# Altium PCB Driver Morpheus v7.0.PcbDoc
Units mm, origin at the board's own origin, x right, y up, seen from the top; angles counter-clockwise.
Board outline 44.45 x 39.88 mm, 2 copper layers (Top Layer, Bottom Layer); 50 components, 26 nets, 168 pads, 13 vias.
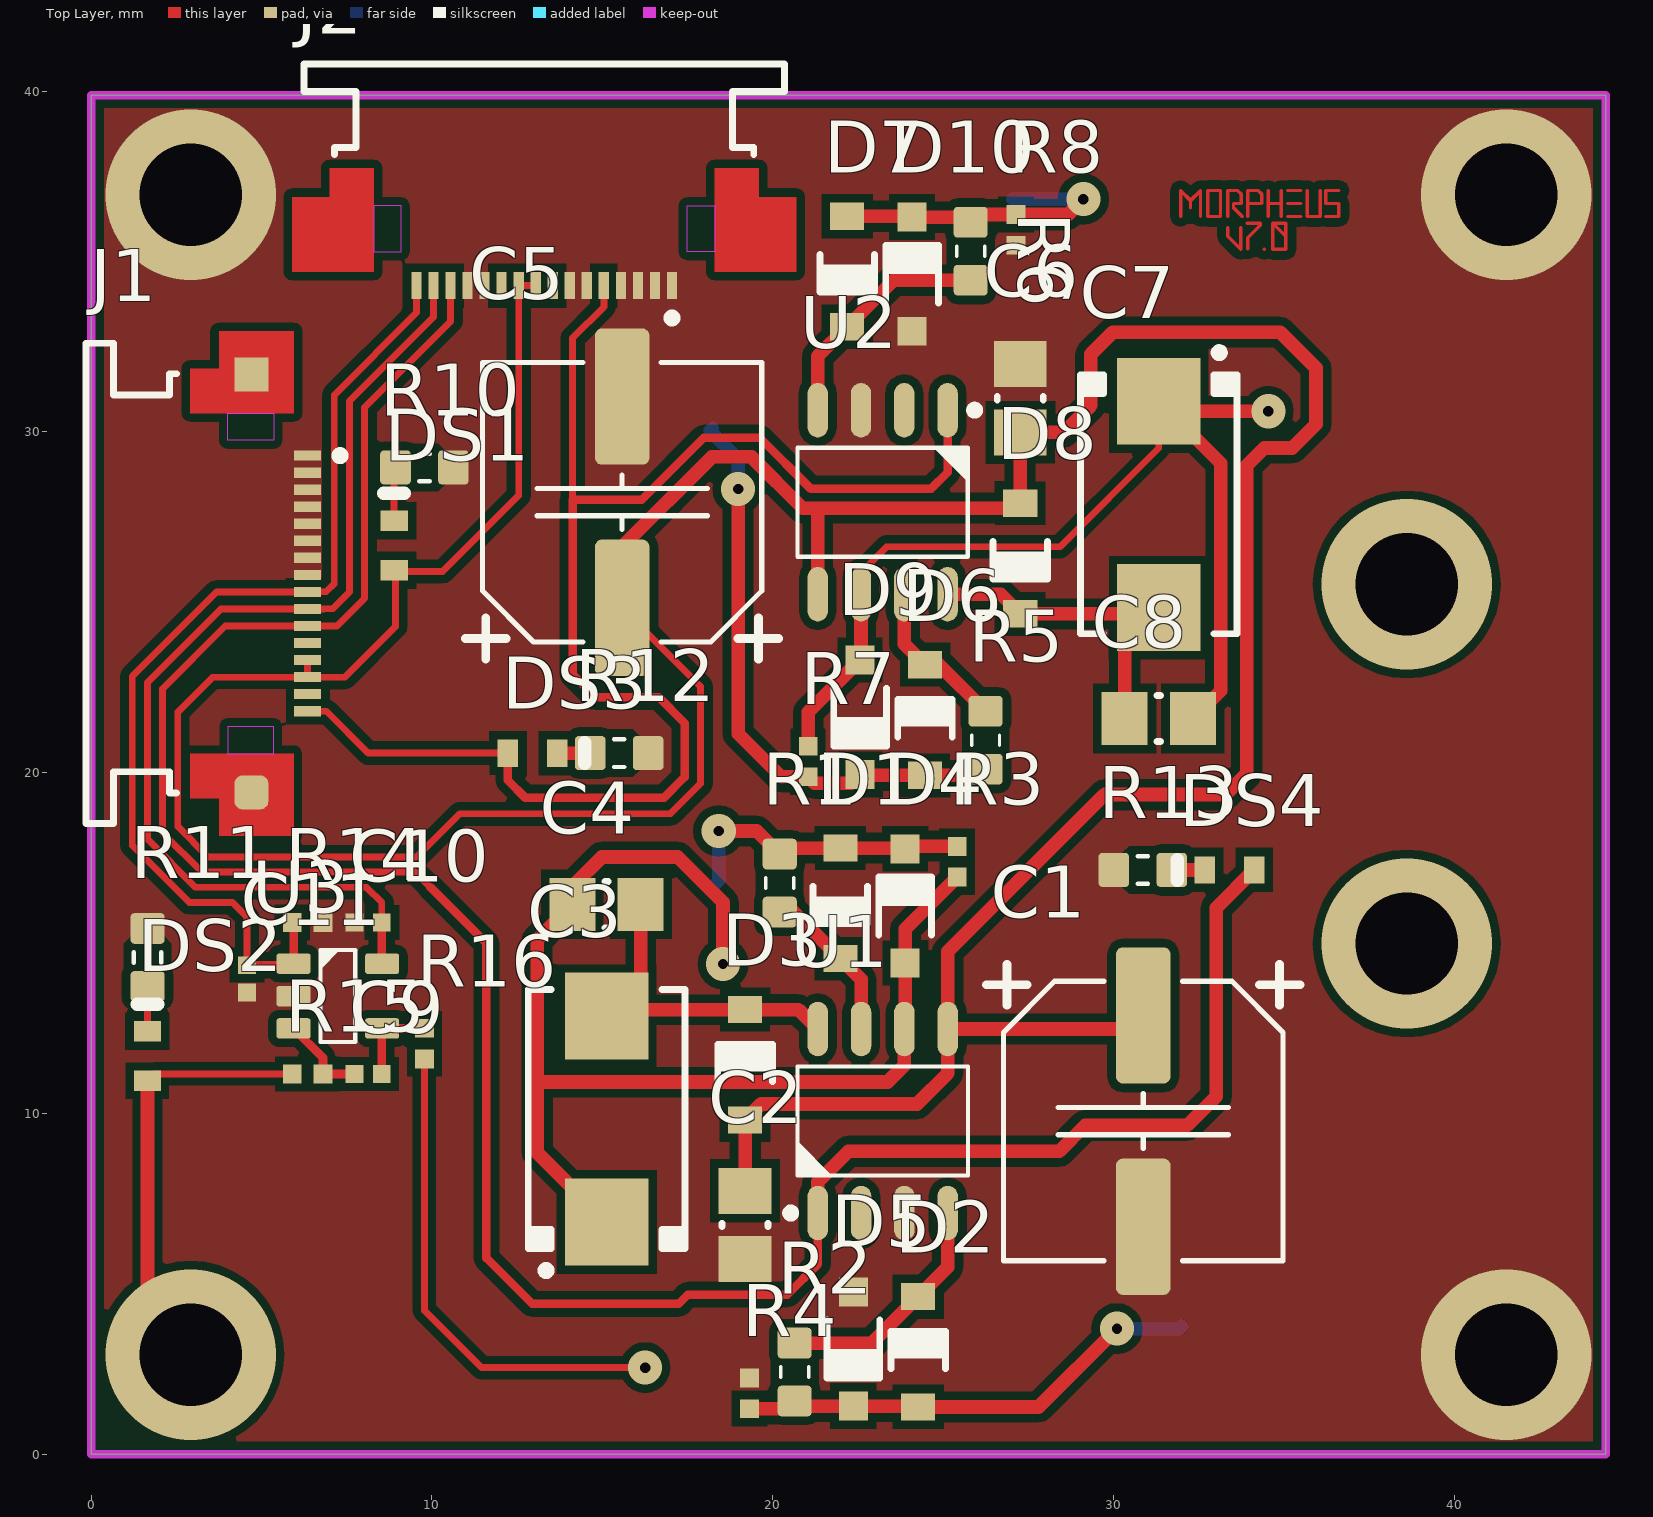
[diagram p0: Top Layer view]
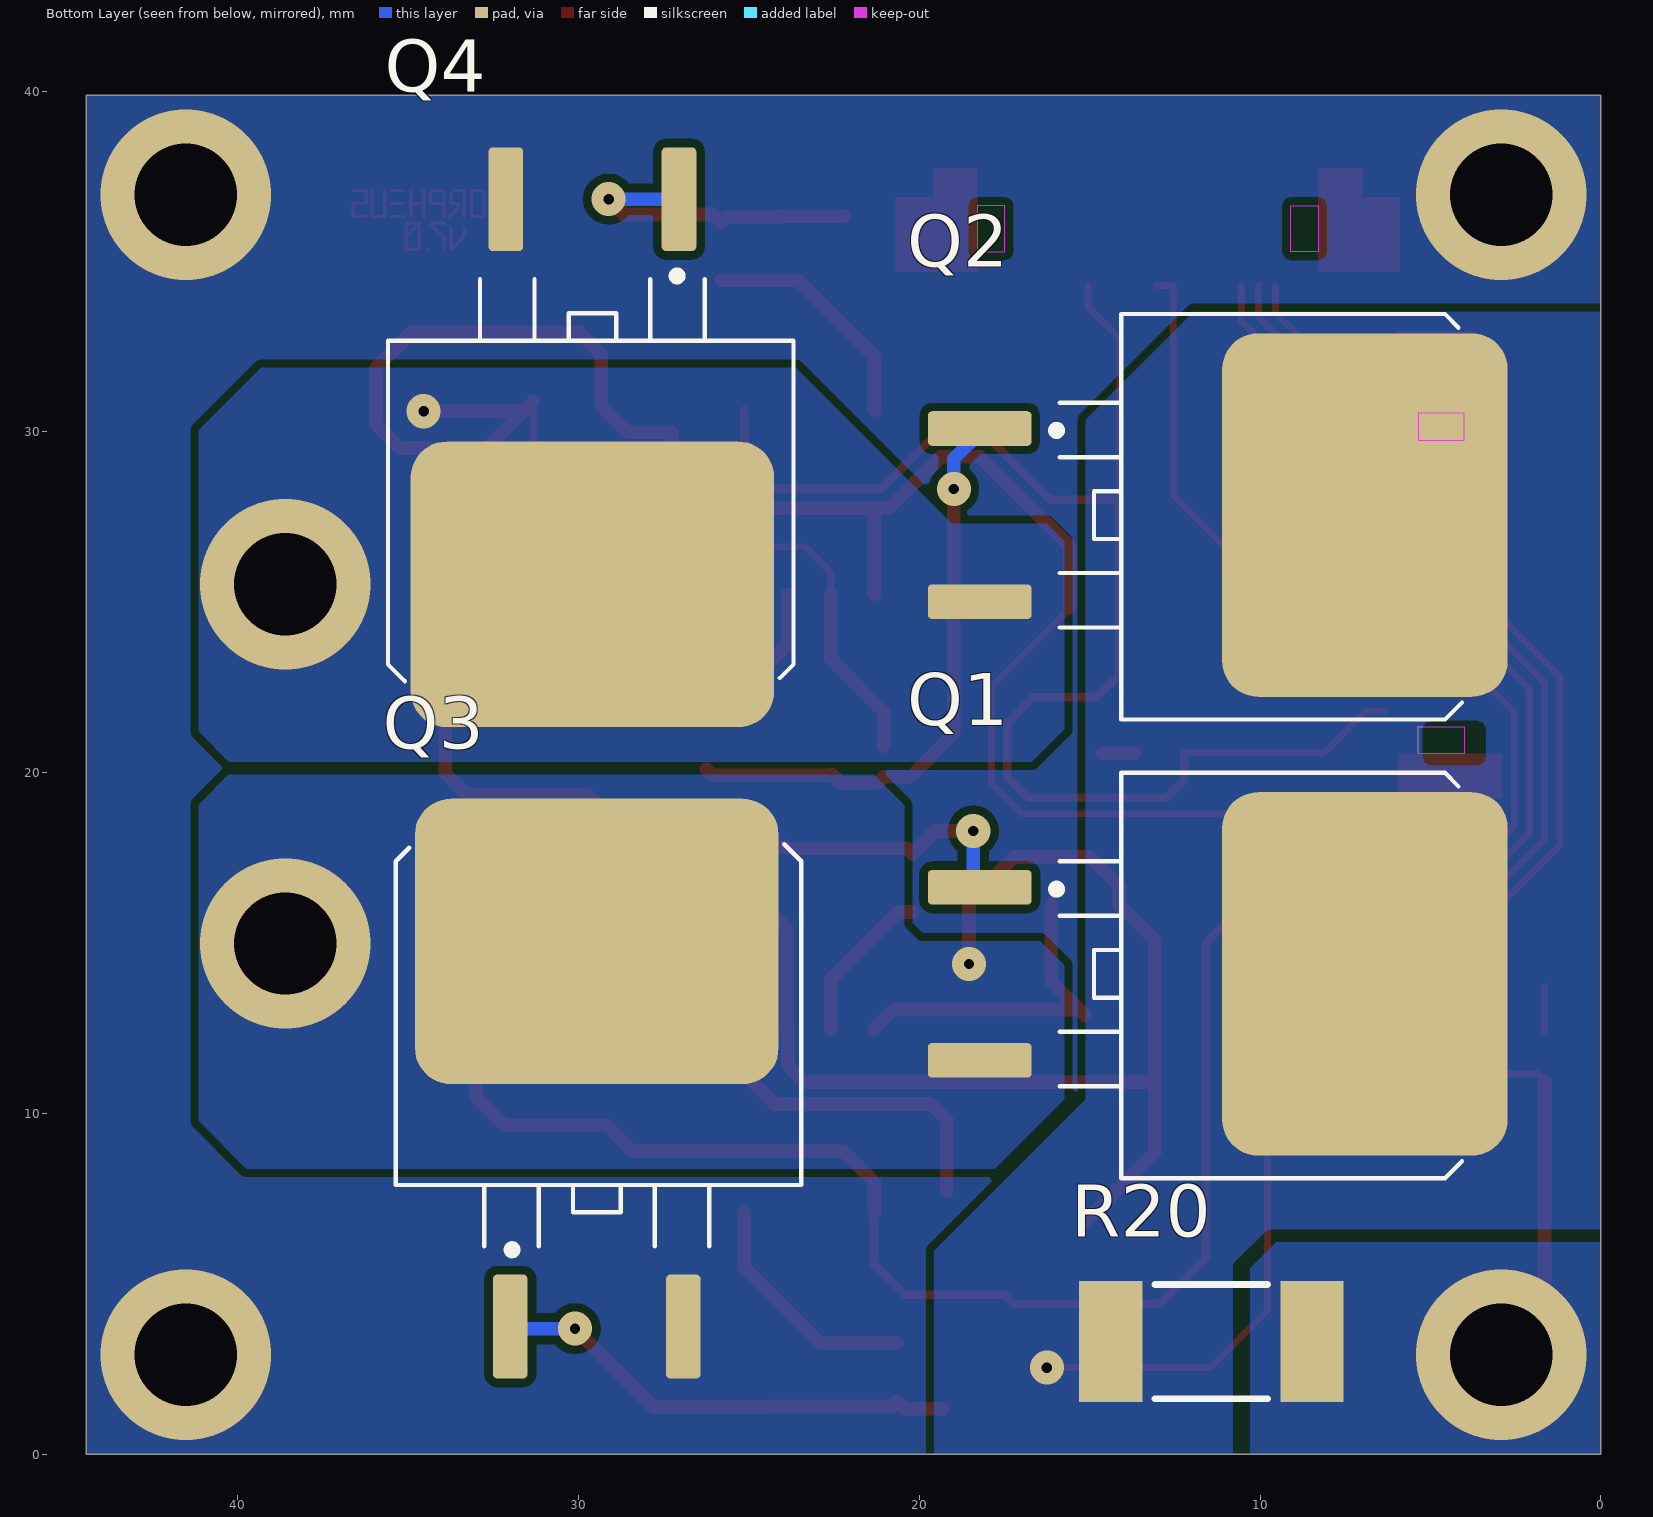
[diagram p1: Bottom Layer view, seen from below]
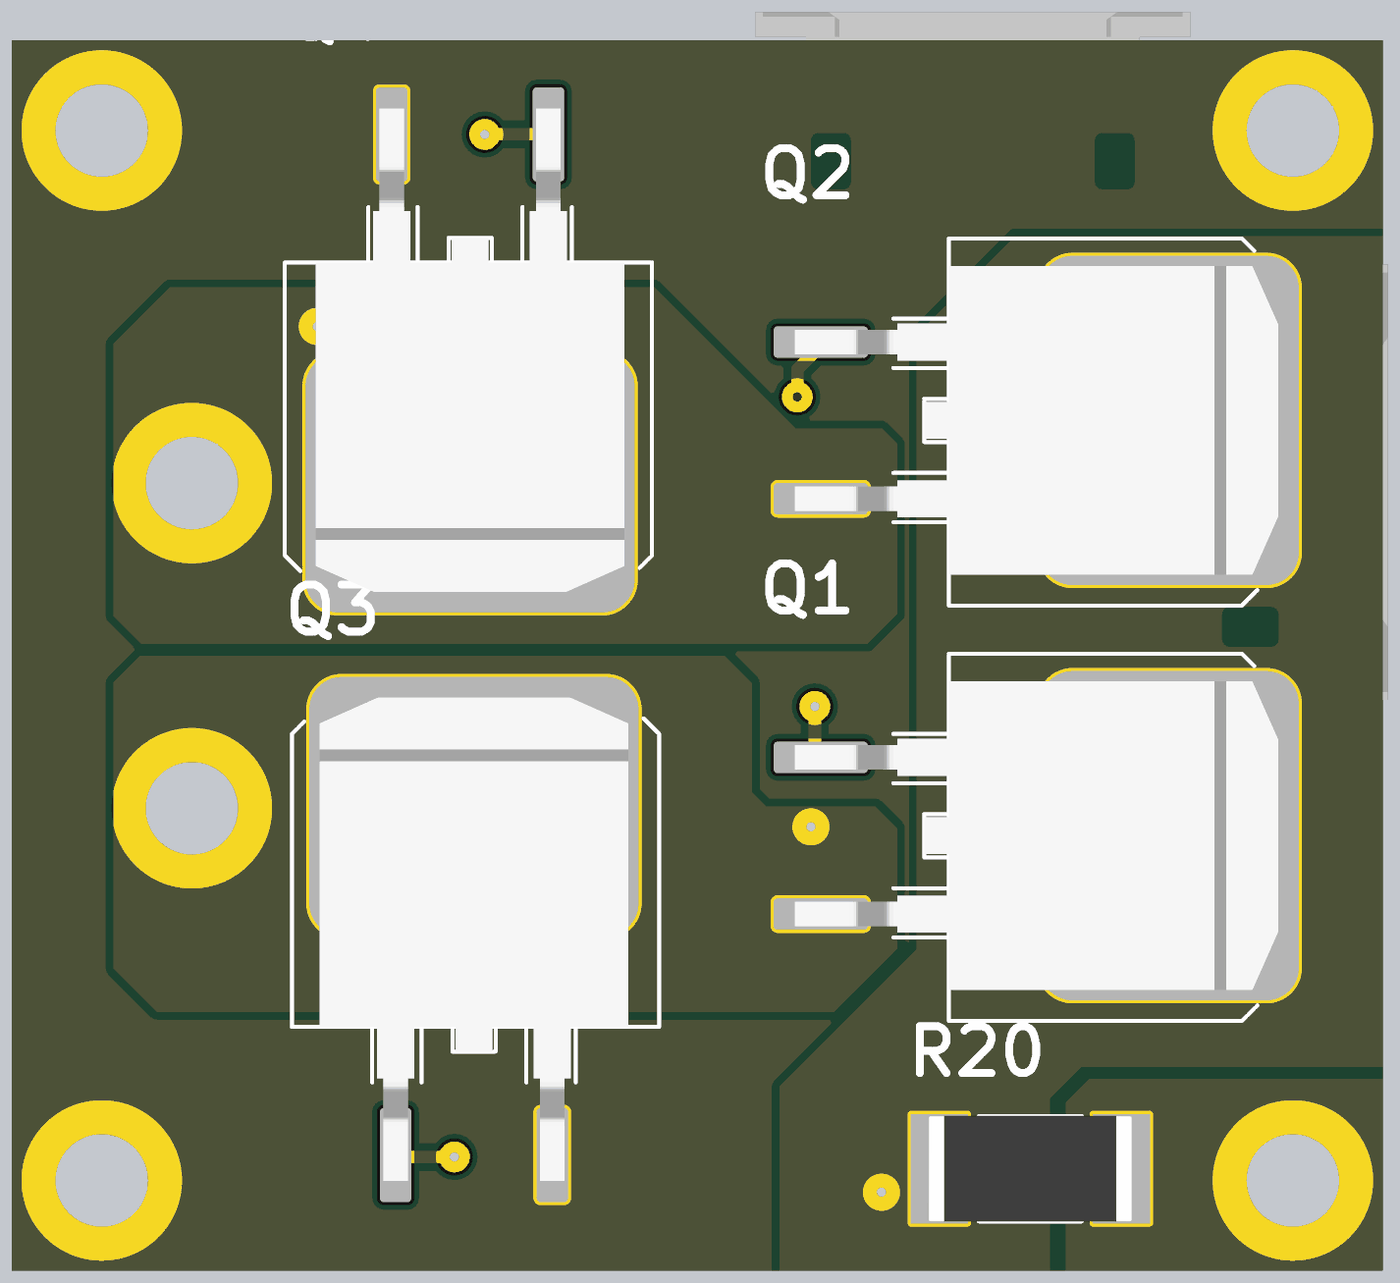
[diagram p2: 3D render of the assembled board from below, using the file's embedded part models]

## Layer stack, top to bottom
Top Solder: solder mask 0.0102, Solder Resist, Dk 3.5
Top Layer: signal copper 0.0356
Dielectric 1: dielectric 0.32, FR-4, Dk 4.8
Bottom Layer: signal copper 0.0356
Bottom Solder: solder mask 0.0102, Solder Resist, Dk 3.5

## Board outline
0,0 44.45,0 44.45,39.878 0,39.878

## Design rules (kind name [scope] priority, off if disabled: settings)
Clearance [All] p1: gap=0.245 ignorepadtopadclearanceinfootprint=TRUE
PlaneConnect [All] p1: planeconnectstyle=Direct reliefexpansion=0.508 reliefentries=4 reliefconductorwidth=0.254 reliefairgap=0.254
PolygonConnect [All] p1: connectstyle=Direct reliefconductorwidth=0.254 reliefentries=4 polygonreliefangle="90 Angle" airgapwidth=0.254
RoutingVias [All] p1: holewidth=0.711 width=1.27 viastyle="Through Hole" minholewidth=0.711 minwidth=1.27 maxholewidth=0.711 maxwidth=1.27
SolderMaskExpansion [All] p1: expansion=0.102
Width [All] p1: maxlimit=0.54 minlimit=0.1 preferedwidth=0.1
29 further rules are at their usual default settings.

## Classes and differential pairs
component class INA169: C9 C10 C11 R14 R15 R16 U3 U?
component class "Driver Morpheus V6.2": C1 C2 C3 C4 C5 C6 C7 C8 D1 D2 D3 D4 D5 D6 D7 D8 D9 D10 DS1 DS2 DS3 DS4 J1 J2 Q1 Q2 Q3 Q4 R1 R2 R3 R4 R5 R6 R7 R8 R10 R11 R12 R13 R20 U1 U2

## Components (designator, comment, footprint, x,y, rotation, side; value= is the part's Value field where it differs from the comment)
C1 "100uF 25v" CAP_ELEC_SIZE_E 30.873,9.777 r180 top
C2 "CAP 100nF 25V 0805(2012)" CAPC0805(2012)145_M 19.189,6.729 r90 top value=100nF
C3 "Cap_10u_35v" "CAP POL 2917/7343" 15.125,9.84 r90 top
C4 "CAP 100nF 25V 0805(2012)" CAPC0805(2012)145_M 15.125,16.127 r0 top value=100nF
C5 "100uF 25v" CAP_ELEC_SIZE_E 15.58,27.938 r0 top
C6 "CAP 100nF 25V 0805(2012)" CAPC0805(2012)145_M 27.264,30.986 r270 top value=100nF
C7 "Cap_10u_35v" "CAP POL 2917/7343" 31.328,27.875 r270 top
C8 "CAP 100nF 25V 0805(2012)" CAPC0805(2012)145_M 31.328,21.588 r180 top value=100nF
C9 "CAP 100nF 25V" CAPC0402(1005)60_L 8.128,11.158 r180 top value=100nF
C10 "CAP 100nF 25V" CAPC0402(1005)60_L 8.128,15.603 r0 top value=100nF
C11 "CAP 100nF 25V" CAPC0402(1005)60_L 4.572,13.952 r90 top value=100nF
D1 "1N4148W" JSCJ-SOD-123-2_V 21.983,16.167 r270 top
D2 "1N4148W" JSCJ-SOD-123-2_V 24.269,3.006 r90 top
D3 "1N4148W" JSCJ-SOD-123-2_V 19.189,11.428 r90 top
D4 "MMSZ5248B-E3-08" VISH-SOD-123-2_V 23.888,16.087 r90 top
D5 "MMSZ5248B-E3-08" VISH-SOD-123-2_V 22.364,3.086 r270 top
D6 "1N4148W" JSCJ-SOD-123-2_V 24.47,21.548 r90 top
D7 "1N4148W" JSCJ-SOD-123-2_V 22.184,34.709 r270 top
D8 "1N4148W" JSCJ-SOD-123-2_V 27.264,26.287 r270 top
D9 "MMSZ5248B-E3-08" VISH-SOD-123-2_V 22.565,21.628 r270 top
D10 "MMSZ5248B-E3-08" VISH-SOD-123-2_V 24.089,34.629 r90 top
DS1 "TLMB1100-GS08" VISH-TLMX1100-2_V 8.89,26.67 r90 top
DS2 "TLMS1100-GS08" VISH-TLMX1100-2_V 1.651,11.684 r90 top
DS3 "TLMG1100-GS08" VISH-TLMX1100-2_V 12.954,20.574 r0 top
DS4 "TLMG1100-GS08" VISH-TLMX1100-2_V 33.401,17.145 r180 top
J1 "52746-1671" MOLX-52746-1671#1 5.526,25.555 r270 top
J2 "52746-1671" MOLX-52746-1671#2 13.294,35.117 r180 top
Q1 "IRF3205S" D2PAK-3 12.573,14.097 r0 bottom
Q2 "IRF3205S" D2PAK-3 12.573,27.559 r0 bottom
Q3 "IRF3205S" D2PAK-3 29.464,9.398 r270 bottom
Q4 "IRF3205S" D2PAK-3 29.591,31.178 r90 bottom
R1 "22" 0603ESDA 20.205,16.762 r90 top
R2 "22" 0603ESDA 20.644,2.411 r270 top
R3 "RC0402JR-071KL" RES-0402 25.412,17.387 r90 top value=10K
R4 "RC0402JR-071KL" RES-0402 19.316,1.786 r270 top value=10K
R5 "22" 0603ESDA 26.248,20.953 r90 top
R6 "22" 0603ESDA 25.809,35.304 r270 top
R7 "RC0402JR-071KL" RES-0402 21.041,20.328 r270 top value=10K
R8 "RC0402JR-071KL" RES-0402 27.137,35.929 r90 top value=10K
R10 "Thick Film" RESC1608X55N 9.779,28.956 r0 top value=750R
R11 "Thick Film" RESC1608X55N 1.653,14.578 r90 top value=2k
R12 "Thick Film" RESC1608X55N 15.494,20.574 r0 top value=200R
R13 "Thick Film" RESC1608X55N 30.861,17.145 r180 top value=200R
R14 "RC0402JR-071KL" RES-0402 6.35,15.603 r180 top value=10K
R15 "RC0402JR-071KL" RES-0402 6.35,11.158 r180 top value=100R
R16 "RC0402JR-071KL" RES-0402 9.779,12.047 r270 top value=100R
R20 "71-WSLF25121L000FEA" RESC6432X89X76ML25T25 11.43,3.302 r180 bottom
U1 "IR2184" SOIC127P600X175-8AN 23.228,9.777 r90 top
U2 "IR2184" SOIC127P600X175-8AN 23.225,27.938 r270 top
U3 "INA169" SOT23-5 7.239,13.444 r0 top

## Footprints (in the part's own frame and the unit in brackets; to place one, negate y for a bottom-side part, rotate by r counter-clockwise, add the part's x,y. Pads: shape width x height; smd on the part's side, far side on the other; paste and mask are expansions set on the pad)
0603ESDA [mm] "Chip ESD suppressor, Body 1.6x0.8mm, 0603, IPC Medium Density"
  round 0.254 on Mech15: 0(0,0)
  rrect25% 0.9x1 smd: 1(-0.85,0) 2(0.85,0)
  Top Layer pour cut-out: -0.65,0.5 -0.45,0.7 0.45,0.7 0.65,0.5 0.65,-0.5 0.45,-0.7 -0.45,-0.7 -0.65,-0.5
  silkscreen extent -0.15,-0.41 0.15,0.41, body extent -0.85,-0.45 0.85,0.45, height 0.79
"CAP POL 2917/7343" [mm] "Molded Capacitor, 2-Leads, Body 7.30x4.30mm, IPC Medium Density"
  rect 2.55x2.45 smd: 1(-3.025,0) 2(3.025,0)
  silkscreen extent -4.57,-2.3 3.8,2.3, body extent -3.65,-2.15 3.65,2.15, height 4.1
CAP_ELEC_SIZE_E [mm] "Capacitor, polarized, aluminum can; 8.0x6.2mm DxH"
  round 0.635 on Mech15: 0(0,0)
  rrect25% 1.6x4 smd: 1(0,-3.1) 2(0,3.1)
  silkscreen extent -4.6,-4.6 4.6,4.1, body extent -4.25,-4.75 4.25,4.75, height 6.5
CAPC0402(1005)60_L [mm] "Chip Capacitor, Body 1.0x0.5mm, Height 0.6mm, IPC High Density"
  rect 0.52x0.52 smd: 1(-0.4,0) 2(0.4,0)
  body extent -0.55,-0.3 0.55,0.3, height 0.6
CAPC0805(2012)145_M [mm] "Chip Capacitor, Body 2.0x1.2mm, Height 1.45mm, IPC Low Density"
  rect 1.35x1.55 smd: 1(-1,0) 2(1,0)
  silkscreen extent -0.05,-0.67 0.05,0.67, body extent -1.1,-0.72 1.1,0.72, height 1.45
D2PAK-3 [mil] "D-PAK/TO-263-3; 3 Leads (1 Cropped); Body 14.7 (inc. leads) x 10.2 mm (LxW max)"
  round 20 on Mech15: 0(0,0)
  rrect25% 120x40 smd: 1(222.5,-100) 3(222.5,100)
  rrect25% 330x420 smd: 2(-222.5,0)
  silkscreen extent -335,-232 139,236, body extent -361,-197 256,197, height 189
JSCJ-SOD-123-2_V [mm] "SMD, 2-Leads, Body 2.7x1.6mm, Height 1.25mm"
  rect 0.8x1 smd: 1(-1.62,0) 2(1.62,0)
  silkscreen extent -0.5,-0.8 0.6,0.8, body extent -1.35,-0.8 1.35,0.8, height 1.25
MOLX-52746-1671#1 [mm] "FPC Connector, 16-Leads, Right Angle, Pitch 0.5 mm, Mated Height 2.0 mm, SMT"
  rect 0.3x0.8 smd: 1(-3.75,0.824) 2(-3.25,0.824) 3(-2.75,0.824) 4(-2.25,0.824) 5(-1.75,0.824) 6(-1.25,0.824) 7(-0.75,0.824) 8(-0.25,0.824) 9(0.25,0.824) 10(0.75,0.824) 11(1.25,0.824) 12(1.75,0.824) 13(2.25,0.824) 14(2.75,0.824) 15(3.25,0.824) 16(3.75,0.824)
  rect 1x1 smd: MP1(-6.134,-0.824)
  rrect50% 1x1 smd: MP2(6.134,-0.824)
  Top Layer region: -7.4,0.424 -5,0.424 -5,-2.626 -5,-2.626 -6.3,-2.626 -6.3,-1.777 -6.3,-1.776 -7.4,-1.776
  Top Layer region: 5,0.424 7.4,0.424 7.4,-1.776 7.4,-1.777 6.3,-1.777 6.3,-2.626 5,-2.626 5,0.424
  Keep-Out Layer region: -5,-0.176 -4.2,-0.176 -4.2,-1.516 -5,-1.516
  Keep-Out Layer region: 5,-0.176 4.2,-0.176 4.2,-1.516 5,-1.516
  silkscreen extent -7.05,-5.68 7.05,1.9, body extent -7.05,-5.68 7.05,0.92, height 2.01
MOLX-52746-1671#2 [mm] "FPC Connector, 16-Leads, Right Angle, Pitch 0.5 mm, Mated Height 2.0 mm, SMT"
  rect 0.3x0.8 smd: 1(-3.75,0.824) 2(-3.25,0.824) 3(-2.75,0.824) 4(-2.25,0.824) 5(-1.75,0.824) 6(-1.25,0.824) 7(-0.75,0.824) 8(-0.25,0.824) 9(0.25,0.824) 10(0.75,0.824) 11(1.25,0.824) 12(1.75,0.824) 13(2.25,0.824) 14(2.75,0.824) 15(3.25,0.824) 16(3.75,0.824)
  round 0 smd: MP1(-2.134,-0.824)
  rect 0x0 smd: MP2(3.134,-0.824)
  Top Layer region: -7.4,0.424 -5,0.424 -5,-2.626 -5,-2.626 -6.3,-2.626 -6.3,-1.777 -6.3,-1.776 -7.4,-1.776
  Top Layer region: 5,0.424 7.4,0.424 7.4,-1.776 7.4,-1.777 6.3,-1.777 6.3,-2.626 5,-2.626 5,0.424
  Keep-Out Layer region: -5,-0.176 -4.2,-0.176 -4.2,-1.516 -5,-1.516
  Keep-Out Layer region: 5,-0.176 4.2,-0.176 4.2,-1.516 5,-1.516
  silkscreen extent -7.05,-5.68 7.05,1.9, body extent -7.05,-5.68 7.05,0.92, height 2.01
RES-0402 [mm]
  rect 0.55x0.55 smd: 1(-0.45,0) 2(0.45,0)
  body extent -0.53,-0.27 0.53,0.28, height 0.4
RESC1608X55N [mm] "Chip Resistor, Body 1.6x0.8mm, EIA 0603, IPC Medium Density"
  round 0.254 on Mech15: 0(0,0)
  rrect25% 0.9x1 smd: 1(-0.85,0) 2(0.85,0)
  Top Layer pour cut-out: -0.6,0.5 -0.4,0.7 0.4,0.7 0.6,0.5 0.6,-0.5 0.4,-0.7 -0.4,-0.7 -0.6,-0.5
  silkscreen extent -0.15,-0.41 0.15,0.41, body extent -0.87,-0.47 0.88,0.48, height 0.54
RESC6432X89X76ML25T25 [mm] "Chip Resistor, 2-Leads, Body 6.6x3.43mm, IPC Low Density"
  rect 1.85x3.55 smd: 1(-2.95,0) 2(2.95,0)
  silkscreen extent -1.65,-1.68 1.65,1.68, body extent -3.3,-1.71 3.3,1.71, height 0.89
SOIC127P600X175-8AN [mm] "SOIC, 8-Leads, Body 4.9x3.9mm, Pitch 1.27mm, IPC Medium Density"
  round 1 on Mech15: 0(0,0)
  oval 1.6x0.6 smd: 1(-2.7,1.905) 2(-2.7,0.635) 3(-2.7,-0.635) 4(-2.7,-1.905) 5(2.7,-1.905) 6(2.7,-0.635) 7(2.7,0.635) 8(2.7,1.905)
  silkscreen extent -2.82,-2.5 1.6,2.82, body extent -3,-2.45 3,2.45, height 1.75
SOT23-5 [mm]
  round 0.5 on Mech15: 0(0,0)
  rrect25% 1x0.6 smd: 1(-1.3,0.95) 2(-1.3,0) 3(-1.3,-0.95) 4(1.3,-0.95) 5(1.3,0.95)
  silkscreen extent -0.51,-1.35 0.51,1.35, body extent -1.4,-1.45 1.4,1.45, height 1.44
VISH-SOD-123-2_V [mm] "SMD, 2-Leads, Body 2.7x1.55mm, Height 1.35mm"
  rect 0.85x0.85 smd: 1(-1.675,0) 2(1.675,0)
  silkscreen extent -0.85,-0.77 0.85,0.78, body extent -1.35,-0.77 1.35,0.77, height 1.35
VISH-TLMX1100-2_V [mm] "SMD, 2-Leads, Body 1.6x0.8mm"
  rect 0.6x0.8 smd: 1(-0.725,0) 2(0.725,0)
  silkscreen extent 1.53,-0.3 1.53,0.3, body extent -0.8,-0.4 0.8,0.4, height 0.65

## Part data
C1: library part Cap_10u_35v
C2 C4 C6 C8: library part CMP-1036-04408-1, "CAP 100nF 25V ±5% 0805 (2012 Metric) Thickness 1.45mm SMD", Case-EIA=0805, Case-Metric=2012, Rated Voltage="25 V", Tolerance=±5%, Max Thickness="1.45 mm", Technology=SMT
C5: library part Cap_100u_25v, "Cap Tântalo"
C9 C10 C11: library part CMP-1034-02073-1, "CAP 100nF 25V ±20% 0402 (1005 Metric) Thickness 0.6mm SMD", Case-EIA=0402, Case-Metric=1005, Rated Voltage="25 V", Tolerance=±20%, Max Thickness="0.6 mm", Technology=SMT
D1 D2 D3 D6 D7 D8: library part CMP-0914-00001-1, "Fast Switching Diode, 75 V, 150 mA, 2-Pin 2.7 x 1.6 x 1.25 mm SMD, Tape and Reel", Manufacturer="Changjiang Electronics", ComponentLink1Description="Manufacturer URL", ComponentLink1URL=http://www.cj-elec.com/, ComponentLink2Description=Datasheet, ComponentLink2URL=http://www.cj-elec.com/txUpfile/20121613352740313.pdf, ComponentLink3Description="Package Specification", ComponentLink3URL=http://www.cj-elec.com/txUpfile/201412112231195145.pdf, DatasheetVersion="Rev. A", IO (mA)=150, IR (uA)=1, Mounting Technology="Surface Mount", PackageDescription="2-Pin SMD, Body 2.7 x 1.6 mm, Height 1.25 mm", PackageReference=SOD-123-2, PackageVersion="Rev. A", Packing="Tape and Reel", PartNumber=1N4148W, PD (mW)=350, Trr (ns)=4, TSTG (degC)="-55 to 150", VF (V)=1.25, VR (V)=75
D4 D5 D9 D10: library part CMP-0931-00036-1, "Small Signal Zener Diode, 18 V +/- 5%, -55 to 155 degC, 2-Pin SOD-123, RoHS, Tape and Reel", Manufacturer="Vishay Semiconductor", Operating Temperature="-55 to 150 degC", Power Dissipation (mW)=500, Test Current (IZT1) (mA)=7, Tolerance="+/- 5%", Zener Voltage (NOM.) (V)=18, ComponentLink1Description="Manufacturer URL", ComponentLink1URL=http://www.vishay.com/, ComponentLink2Description=Datasheet, ComponentLink2URL=http://www.vishay.com/docs/85774/mmsz5225.pdf, ComponentLink3Description="Package Specification", ComponentLink3URL=http://www.vishay.com/docs/85774/mmsz5225.pdf, DatasheetVersion="Rev. 1.9", Int. Construction=Single, Mounting Technology="Surface Mount", PackageDescription="2-Pin SMD, Body 2.7 x 1.55 mm, Height 1.35 mm", PackageReference=SOD-123-2, PackageVersion="Rev. 1.9", Packing="Tape and Reel", PartNumber=MMSZ5248B-E3-08, RoHS=TRUE, Zener Impedance (IZT1) (Max.) (Ohm)=21
DS1: library part CMP-1666-00028-1, "Blue LED, 15 mA, 3.9 V, -40 to 100 degC, 2-Pin SMD (0603), RoHS, Tape and Reel / (https://br.mouser.com/datasheet/2/427/tlmb1100-279843.pdf)", Capacitance="10 nF", Case\Package=Radial, Max Operating Temperature="125 degC", Min Operating Temperature="-55 degC", Package Quantity=500, Tolerance=10%, Type (Capacitors)=X7R, Voltage Rating="100 V", ComponentLink1Description="Manufacturer URL", ComponentLink1URL=http://www.vishay.com/, ComponentLink2Description=Datasheet, ComponentLink2URL=http://download.siliconexpert.com/pdfs/2016/8/7/12/43/26/667/vsh_/manual/379263299541529tlmb1100.pdf, DatasheetVersion="Rev. 2.7, 03/2016", Height="2.54 mm", Lead Pitch="2.54 mm", Length="5.33 mm", Mount="Through Hole", PackageDescription="2-Pin Surface Mount Device, Body 1.6 x 0.8 mm", PackageReference=0603, Packaging=Bulk, Pins=2, Radiation Hardening=No, REACH SVHC="No SVHC", RoHSCompliant=true, Width="3.81 mm"
DS2: library part CMP-1666-00028-1, "Red LED, 10 mA, 2.0 V, -40 to 100 degC, 2-Pin SMD (0603), RoHS, Tape and Reel / (https://br.mouser.com/datasheet/2/427/tlmb1100-279843.pdf)", Capacitance="10 nF", Case\Package=Radial, Max Operating Temperature="125 degC", Min Operating Temperature="-55 degC", Package Quantity=500, Tolerance=10%, Type (Capacitors)=X7R, Voltage Rating="100 V", ComponentLink1Description="Manufacturer URL", ComponentLink1URL=http://www.vishay.com/, ComponentLink2Description=Datasheet, ComponentLink2URL=http://download.siliconexpert.com/pdfs/2016/8/7/12/43/26/667/vsh_/manual/379263299541529tlmb1100.pdf, DatasheetVersion="Rev. 2.7, 03/2016", Height="2.54 mm", Lead Pitch="2.54 mm", Length="5.33 mm", Mount="Through Hole", PackageDescription="2-Pin Surface Mount Device, Body 1.6 x 0.8 mm", PackageReference=0603, Packaging=Bulk, Pins=2, Radiation Hardening=No, REACH SVHC="No SVHC", RoHSCompliant=true, Width="3.81 mm"
DS3 DS4: library part CMP-1666-00028-1, "Green LED, 15 mA, 2.1 V, -40 to 100 degC, 2-Pin SMD (0603), RoHS, Tape and Reel / (https://br.mouser.com/datasheet/2/427/tlmb1100-279843.pdf)", Capacitance="10 nF", Case\Package=Radial, Max Operating Temperature="125 degC", Min Operating Temperature="-55 degC", Package Quantity=500, Tolerance=10%, Type (Capacitors)=X7R, Voltage Rating="100 V", ComponentLink1Description="Manufacturer URL", ComponentLink1URL=http://www.vishay.com/, ComponentLink2Description=Datasheet, ComponentLink2URL=http://download.siliconexpert.com/pdfs/2016/8/7/12/43/26/667/vsh_/manual/379263299541529tlmb1100.pdf, DatasheetVersion="Rev. 2.7, 03/2016", Height="2.54 mm", Lead Pitch="2.54 mm", Length="5.33 mm", Mount="Through Hole", PackageDescription="2-Pin Surface Mount Device, Body 1.6 x 0.8 mm", PackageReference=0603, Packaging=Bulk, Pins=2, Radiation Hardening=No, REACH SVHC="No SVHC", RoHSCompliant=true, Width="3.81 mm"
J1 J2: library part CMP-1241-00378-1, "0.5 mm Pitch Easy-On(TM) Type FPC Connector, 2.0 mm Mated Height, Right Angle, ZIF, SMT, Bottom Contact, 16 Circuits, -20 to 85 degC, ELV and RoHS Compliant, Tape and Reel", Current (Max per Contact)=0.5A, Manufacturer=Molex, Voltage (Max)=50V, Circuits (Loaded)=16, ComponentLink1Description="Manufacturer URL", ComponentLink1URL=http://www.molex.com/molex/index.jsp, ComponentLink2Description=Datasheet, ComponentLink2URL=http://www.molex.com/webdocs/datasheets/pdf/en-us/0527461671_FFC_FPC_CONNECTORS.pdf, ComponentLink3Description="Package Specification", ComponentLink3URL=http://www.molex.com/pdm_docs/sd/527461671_sd.pdf, Contact Position=Bottom, Durability (mating cycles max)=20, Entry Angle="90degrees Angle", Mated Height=2.00mm, Material - Metal="Phosphor Bronze", Material - Plating Mating=Gold, Material - Plating Termination=Gold, Mounting Technology="Surface Mount", Number of Rows=1, Orientation="Right Angle", PackageDescription="16-Lead FPC Connector, Pitch 0.5 mm", PackageReference=52746-1671, PackageVersion="Rev. H, 05/2009", Packing="Tape and Reel", PartNumber=52746-1671, PCB Locator=No, PCB Retention=Yes, Pitch - Mating Interface=0.50mm, Polarized to PCB=Yes, RoHS=TRUE, Stackable=No
Q1 Q2 Q3 Q4: "HEXFET Power MOSFET", ComponentLink1Description="Manufacturer Link", ComponentLink1URL=http://www.irf.com/, ComponentLink2Description=Datasheet, ComponentLink2URL=http://www.irf.com/product-info/datasheets/data/irf3205s.pdf, DatasheetVersion=Aug-1997, LatestRevisionDate=20-Nov-2009, LatestRevisionNote="IPC-7351 Footprint Added.", PackageDescription="3-Pin Transistor Outline Package 2.54 mm Pitch, 15.1 mm Lead Span", PackageReference=D2PAK, Published=8-Jun-2000, Publisher="Altium Limited"
R1 R2 R5 R6: library part ERJ-3EKF22R0V, "RES SMD 22 OHM 1% 1/10W 0603", Digi-Key Part Number=P22.0HCT-ND, Manufacturer="Panasonic Electronic Components", Operating Temperature="-55°C ~ 155°C", Package / Case="0603 (1608 Metric)", Power (Watts)="0.1W, 1/10W", Supplier Device Package=0603, Temperature Coefficient=±100ppm/°C, Tolerance=±1%, @ qty=1500, Composition="Thick Film", Datasheets=http://industrial.panasonic.com/www-cgi/jvcr13pz.cgi?E+PZ+3+AOA0002+ERJ3EKF22R0V+7+WW, Factory Stock=0, Failure Rate=-, Features="Automotive AEC-Q200", Height - Seated (Max)="0.022\" (0.55mm)", Image=//media.digikey.com/Photos/Panasonic%20Photos/MFG_ERJ-P6W%20Series.jpg, Minimum Quantity=1, Number of Terminations=2, Packaging="Cut Tape (CT)", Part Number=ERJ-3EKF22R0V, Part Status=Active, Quantity Available=100321, Series=ERJ, Size / Dimension="0.063\" L x 0.031\" W (1.60mm x 0.80mm)", Unit Price (USD)=0.00379
R3 R4 R7 R8 R14: library part "RES 1K 0402", "RES SMD 10K OHM 5% 1/16W 0402"
R10: library part RES_220R_0603_5%, "Resistor SMD chip 750 Ohm 1/16W 5% 0603", Manufacturer 1=Yageo, Manufacturer 2="Panasonic Electronic Components", Manufacturer 3="Stackpole Electronics Inc", Manufacturer 4="Rohm Semiconductor", Manufacturer 5="Royal Ohm", Manufacturer Part Number 1=RC0603JR-07220RL, Manufacturer Part Number 2=ERJ-3GEYJ221V, Manufacturer Part Number 3=RMCF0603JT220R, Manufacturer Part Number 4=MCR03ERTJ221, Manufacturer Part Number 5=0603WAJ0221, Package / Case="0603 (1608 metric)", Ratings="1/10 W", Supplier Part Number 1=311-220GRCT-ND, Tolerance=±5%, ComponentLink1Description=http://www.yageo.com/documents/recent/PYu-RC0603_51_RoHS_L_4.pdf, ComponentLink1URL=http://www.yageo.com/documents/recent/PYu-RC0603_51_RoHS_L_4.pdf, ComponentLink2Description=http://industrial.panasonic.com/www-cgi/jvcr13pz.cgi?E+PZ+3+AOA0001+ERJ3GEYJ221V+7+WW, ComponentLink2URL=http://industrial.panasonic.com/www-cgi/jvcr13pz.cgi?E+PZ+3+AOA0001+ERJ3GEYJ221V+7+WW, ComponentLink3Description=http://www.seielect.com/Catalog/SEI-RMCF_RMCP.pdf, ComponentLink3URL=http://www.seielect.com/Catalog/SEI-RMCF_RMCP.pdf, ComponentLink4Description=http://rohmfs.rohm.com/en/products/databook/datasheet/passive/resistor/chip_resistor/mcr_g.pdf, ComponentLink4URL=http://rohmfs.rohm.com/en/products/databook/datasheet/passive/resistor/chip_resistor/mcr_g.pdf, Material="Thick Film", RoHS 1="RoHS Compliant", RoHS 2="RoHS Compliant", RoHS 3="RoHS Compliant", RoHS 4="RoHS Compliant", SCDType=spec, Supplier 1=Digi-Key, Supplier 2=Digi-Key, Supplier 3=Digi-Key, Supplier 4=Digi-Key, Supplier Part Number 2=P220GCT-ND, Supplier Part Number 3=RMCF0603JT220RCT-ND, Supplier Part Number 4=RHM220CGCT-ND
R11: library part RES_220R_0603_5%, "Resistor SMD chip 2k Ohm 1/16W 5% 0603", Manufacturer 1=Yageo, Manufacturer 2="Panasonic Electronic Components", Manufacturer 3="Stackpole Electronics Inc", Manufacturer 4="Rohm Semiconductor", Manufacturer 5="Royal Ohm", Manufacturer Part Number 1=RC0603JR-07220RL, Manufacturer Part Number 2=ERJ-3GEYJ221V, Manufacturer Part Number 3=RMCF0603JT220R, Manufacturer Part Number 4=MCR03ERTJ221, Manufacturer Part Number 5=0603WAJ0221, Package / Case="0603 (1608 metric)", Ratings="1/10 W", Supplier Part Number 1=311-220GRCT-ND, Tolerance=±5%, ComponentLink1Description=http://www.yageo.com/documents/recent/PYu-RC0603_51_RoHS_L_4.pdf, ComponentLink1URL=http://www.yageo.com/documents/recent/PYu-RC0603_51_RoHS_L_4.pdf, ComponentLink2Description=http://industrial.panasonic.com/www-cgi/jvcr13pz.cgi?E+PZ+3+AOA0001+ERJ3GEYJ221V+7+WW, ComponentLink2URL=http://industrial.panasonic.com/www-cgi/jvcr13pz.cgi?E+PZ+3+AOA0001+ERJ3GEYJ221V+7+WW, ComponentLink3Description=http://www.seielect.com/Catalog/SEI-RMCF_RMCP.pdf, ComponentLink3URL=http://www.seielect.com/Catalog/SEI-RMCF_RMCP.pdf, ComponentLink4Description=http://rohmfs.rohm.com/en/products/databook/datasheet/passive/resistor/chip_resistor/mcr_g.pdf, ComponentLink4URL=http://rohmfs.rohm.com/en/products/databook/datasheet/passive/resistor/chip_resistor/mcr_g.pdf, Material="Thick Film", RoHS 1="RoHS Compliant", RoHS 2="RoHS Compliant", RoHS 3="RoHS Compliant", RoHS 4="RoHS Compliant", SCDType=spec, Supplier 1=Digi-Key, Supplier 2=Digi-Key, Supplier 3=Digi-Key, Supplier 4=Digi-Key, Supplier Part Number 2=P220GCT-ND, Supplier Part Number 3=RMCF0603JT220RCT-ND, Supplier Part Number 4=RHM220CGCT-ND
R12 R13: library part RES_220R_0603_5%, "Resistor SMD chip 200 Ohm 1/16W 5% 0603", Manufacturer 1=Yageo, Manufacturer 2="Panasonic Electronic Components", Manufacturer 3="Stackpole Electronics Inc", Manufacturer 4="Rohm Semiconductor", Manufacturer 5="Royal Ohm", Manufacturer Part Number 1=RC0603JR-07220RL, Manufacturer Part Number 2=ERJ-3GEYJ221V, Manufacturer Part Number 3=RMCF0603JT220R, Manufacturer Part Number 4=MCR03ERTJ221, Manufacturer Part Number 5=0603WAJ0221, Package / Case="0603 (1608 metric)", Ratings="1/10 W", Supplier Part Number 1=311-220GRCT-ND, Tolerance=±5%, ComponentLink1Description=http://www.yageo.com/documents/recent/PYu-RC0603_51_RoHS_L_4.pdf, ComponentLink1URL=http://www.yageo.com/documents/recent/PYu-RC0603_51_RoHS_L_4.pdf, ComponentLink2Description=http://industrial.panasonic.com/www-cgi/jvcr13pz.cgi?E+PZ+3+AOA0001+ERJ3GEYJ221V+7+WW, ComponentLink2URL=http://industrial.panasonic.com/www-cgi/jvcr13pz.cgi?E+PZ+3+AOA0001+ERJ3GEYJ221V+7+WW, ComponentLink3Description=http://www.seielect.com/Catalog/SEI-RMCF_RMCP.pdf, ComponentLink3URL=http://www.seielect.com/Catalog/SEI-RMCF_RMCP.pdf, ComponentLink4Description=http://rohmfs.rohm.com/en/products/databook/datasheet/passive/resistor/chip_resistor/mcr_g.pdf, ComponentLink4URL=http://rohmfs.rohm.com/en/products/databook/datasheet/passive/resistor/chip_resistor/mcr_g.pdf, Material="Thick Film", RoHS 1="RoHS Compliant", RoHS 2="RoHS Compliant", RoHS 3="RoHS Compliant", RoHS 4="RoHS Compliant", SCDType=spec, Supplier 1=Digi-Key, Supplier 2=Digi-Key, Supplier 3=Digi-Key, Supplier 4=Digi-Key, Supplier Part Number 2=P220GCT-ND, Supplier Part Number 3=RMCF0603JT220RCT-ND, Supplier Part Number 4=RHM220CGCT-ND
R15 R16: library part "RES 1K 0402", "RES SMD 100 OHM 5% 1/16W 0402"
R20: library part CMP-2000-07419-1, "Chip Resistor, 1 mOhm, +/- 1%, 6 W, -65 to 170 degC, 2512 (6432 Metric), RoHS, Tape and Reel                        71-WSLF25121L000FEA", Case Code - in=2512, Case Code - mm=6432, Case Height=0.635mm, Case Length=6.4mm, Case Width=3.2mm, Manufacturer=Vishay, Operating Temperature Range=-65Cto+170C, Package / Case=2512(6432metric), Package Description="2-Pin Surface Mount Device, Body 6.35 x 3.18 mm", Power Rating=6W, Resistance=0.009Ohms, Temperature Coefficient=75PPM/C, Tolerance=1%, Brand=Vishay/Dale, Datasheet URL=http://www.vishay.com/docs/30100/wsl.pdf, Datasheet Version=07/2016, Factory Pack Quantity=2000, Manufacturer URL=http://www.vishay.com/, Mounting Technology=SurfaceMount, Package Reference=2512, Packaging=Reel, Product=MetalElementCurrentSensingResistors, Product Category=CurrentSenseResistors-SMD, RoHS=Details, Series=WSL, Termination Style=SMD/SMT, Type=PowerMetalStripResistors,LowValue(downto0.0005Ohms),SurfaceMount
U1 U2: PSpiceTemplate="X^@REFDES %VCC %IN %SD %COM %VB %HO %VS %LO @MODEL PARAMS:  ?CDELAY|CDELAY=@CDELAY||CDELAY=50N| ?RDELAY|RDELAY=@RDELAY||RDELAY=50| ?T1|T1=@T1||T1=-40| ?T2|T2=@T2||T2=25| ?T3|T3=@T3||T3=125| ?V1|V1=@V1||V1=10| ?V2|V2=@V2||V2=15| ?V3|V3=@V3||V3=20| ?TOFFT1|TOFFT1=@TOFFT1||TOFFT1=270N| ?TOFFT2|TOFFT2=@TOFFT2||TOFFT2=270N| ?TOFFT3|TOFFT3=@TOFFT3||TOFFT3=270N| ?TOFFV1|TOFFV1=@TOFFV1||TOFFV1=270N| ?TOFFV2|TOFFV2=@TOFFV2||TOFFV2=270N| ?TOFFV3|TOFFV3=@TOFFV3||TOFFV3=270N| ?TONT1|TONT1=@TONT1||TONT1=210N| ?TONT2|TONT2=@TONT2||TONT2=210N| ?TONT3|TONT3=@TONT3||TONT3=210N| ?TONV1|TONV1=@TONV1||TONV1=210N| ?TONV2|TONV2=@TONV2||TONV2=210N| ?TONV3|TONV3=@TONV3||TONV3=210N|", CDELAY=50N, RDELAY=50, T1=-40, T2=25, T3=125, TOFFT1=270N, TOFFT2=270N, TOFFT3=270N, TOFFV1=270N, TOFFV2=270N, TOFFV3=270N, TONT1=210N, TONT2=210N, TONT3=210N, TONV1=210N, TONV2=210N, TONV3=210N, V1=10, V2=15, V3=20
U3: Package=SOT23-5, Availability=Unavailable, DeviceSetName=INA169, GateName_1=G$1, LibraryName=INA169, MF="Texas Instruments", MP=INA169, Price=None, SymbolName_1=INA169

## Via types
v1: diameter 1, hole 0.3, Top Layer to Bottom Layer, 7 vias
v2: diameter 5, hole 3, Top Layer to Bottom Layer, 6 vias

## Nets (pads, with @x,y where several pads share a name; then routed paths per layer and width w, separated by ;. In a path a pad name is that pad's centre, name@x,y a point inside that pad or via, vN(x,y) a via of type N, cw(c..) or ccw(c..) an arc to the next point about the centre after c; other vN are vias at no path point)
+3.3v: C10.2 J1.10 J2.15 U3.5 | length 31.1
  Top Layer w0.2: C10.2 8.528,16.188 8.079,16.637 3.062,16.637 1.65,18.049 1.65,22.646 3.804,24.8 6.345,24.8 J1.10 6.834,24.805 6.834,24.81 7.087,24.81 7.578,25.301 7.578,30.905 10.044,33.371 J2.15
  Top Layer w0.254: C10.2 8.528,14.405 U3.5
"BAT 5S": DS2.1 R15.2 R20.2 | length 12.9
  Top Layer w0.2: DS2.1 1.85,11.158 R15.2
  Top Layer w0.4: DS2.1 1.651,4.191 v2(2.921,2.921)
GND: C1.2 C2.1 C5.2 C6.1 C10.1 C11.1 D5.1 D10.1 J1.1 J1.2 J1.3 J1.4 J1.5 J1.6 J1.7 J1.8 J2.1 J2.2 J2.3 J2.4 J2.6 J2.7 J2.12 J2.13 Q3.3 Q4.3 R4.1 R8.1 R10.2 R11.2 R12.2 R13.2 R14.1 U1.3 U2.3 U3.2
  other v2: 41.529,2.921 2.921,36.957 41.529,36.957
IN_1: DS4.1 J1.11 J2.14 U1.1 | length 74.6
  Top Layer w0.2: 9.955,16.637 9.51,17.082 3.246,17.082 2.095,18.233 2.095,22.462 3.933,24.3 6.345,24.3 J1.11 7.211,24.305 8.023,25.117 8.023,30.721 10.544,33.242 J2.14
  Top Layer w0.25: 9.955,16.637 11.599,14.993 11.599,5.757 12.947,4.409 17.236,4.409 17.511,4.684 20.432,4.684 21.323,5.575 U1.1
  Top Layer w0.4: U1.1 21.323,7.988 22.225,8.89 28.412,8.89 29.174,9.652 32.168,9.652 33.02,10.504 33.02,16.039 DS4.1
IN_2: DS3.1 J1.16 J2.5 U2.1 | length 44.5
  Top Layer w0.2: J1.16 6.897,21.805 8.128,20.574 DS3.1 ; 14.125,28.006 14.125,32.754 15.044,33.673 J2.5
  Top Layer w0.25: DS3.1 12.229,19.775 12.738,19.266 16.81,19.266 17.414,19.87 17.414,21.456 16.653,22.217 14.796,22.217 14.125,22.888 14.125,28.006 16.151,28.006 17.981,29.836 19.613,29.836 21.118,28.331 24.648,28.331 25.13,28.813 U2.1
NetC3_1: C3.1 C4.1 D4.1 Q1.3 Q3.2 R3.1 U1.6 | length 35.4
  Top Layer w0.4: C3.1 13.085,8.854 13.085,10.922 ; v1(18.542,14.384) 18.542,16.196 17.212,17.526 14.986,17.526 14.125,16.665 C4.1 13.085,15.087 13.085,10.922 ; R3.1 23.888,15.413 D4.1 23.888,12.502 U1.6 23.863,11.417 23.368,10.922 13.085,10.922
  other v2: 38.608,14.986
NetC3_2: C3.2 C4.2 D3.2 U1.8 | length 9.9
  Top Layer w0.4: C3.2 C3.2@15.308,13.048 ; C4.2 16.125,13.865 C3.2@15.308,13.048 ; U1.8 20.752,13.048 D3.2 C3.2@15.308,13.048
NetC7_1: C7.1 C8.1 D9.1 Q2.3 Q4.2 R7.1 U2.6 | length 30.7
  Top Layer w0.2: U2.6 22.59,25.878 23.341,26.629 28.427,26.629 31.328,29.53 C7.1
  Top Layer w0.4: R7.1 21.041,21.779 D9.1 22.59,23.328 U2.6 ; C7.1 C7.1@31.621,30.607 ; C8.1 33.147,22.407 33.147,29.081 C7.1@31.621,30.607 ; v1(34.544,30.607) C7.1@31.621,30.607
  other v2: 38.608,25.527
NetC7_2: C7.2 C8.2 D8.2 U2.8 | length 11.3
  Top Layer w0.4: U2.8 26.693,25.238 D8.2 C7.2@31.144,24.667 ; C8.2 30.328,23.85 C7.2@31.144,24.667 ; C7.2@32.328,23.85 C7.2 C7.2@31.144,24.667
NetC9_1: C9.1 R16.1 U3.4 | length 2.6
  Top Layer w0.254: C9.1 8.528,12.483 U3.4 9.776,12.494 R16.1
NetC9_2: C9.2 R15.1 U3.3 | length 2.6
  Top Layer w0.254: U3.3 6.8,11.633 R15.1 C9.2
NetC11_2: C11.2 J1.9 J2.16 R14.2 U3.1 | length 30
  Top Layer w0.2: C11.2 4.572,15.765 4.145,16.192 2.878,16.192 1.205,17.865 1.205,22.831 3.674,25.3 6.345,25.3 J1.9 6.355,25.31 6.893,25.31 7.133,25.55 7.133,31.089 9.544,33.5 J2.16
  Top Layer w0.254: C11.2 5.897,14.352 U3.1 5.939,15.564 R14.2
NetD1_1: D1.1 D4.2 Q1.1 R1.2 R3.2 | length 9.2
  Top Layer w0.4: v1@18.288,18.288 v1(18.415,18.288) 19.529,18.288 R1.2 20.38,17.787 D1.1 23.863,17.787 23.913,17.837 R3.2
  Bottom Layer w0.4: Q1.1 18.415,16.828 v1(18.415,18.288)
NetD1_2: D1.2 R1.1 U1.7 | length 4.7
  Top Layer w0.4: R1.1 20.618,15.912 D1.2 22.593,13.937 U1.7
NetD2_1: D2.1 D5.2 Q3.1 R2.2 R4.2 | length 13.8
  Top Layer w0.4: R4.2 20.419,1.336 R2.2 20.794,1.411 D5.2 24.244,1.411 D2.1 27.802,1.386 v1(30.099,3.683)
  Bottom Layer w0.4: v1(30.099,3.683) 31.94,3.683 Q3.1
NetD2_2: D2.2 R2.1 U1.4 | length 7
  Top Layer w0.4: R2.1 22.904,3.261 D2.2 25.133,5.49 U1.4
NetD6_1: D6.1 D9.2 Q2.1 R5.1 R7.2 | length 17.4
  Top Layer w0.4: v1(18.985,28.321) 18.985,21.141 20.248,19.878 R7.2 21.234,19.685 22.297,19.685 D9.2 22.59,19.928 D6.1 26.073,19.928 R5.1
  Bottom Layer w0.4: Q2.1 18.161,30.035 18.985,29.212 v1(18.985,28.321)
NetD6_2: D6.2 R5.2 U2.7 | length 4.7
  Top Layer w0.4: U2.7 23.86,23.778 D6.2 24.883,23.168 R5.2
NetD7_1: D7.1 D10.2 Q4.1 R6.1 R8.2 | length 9.1
  Top Layer w0.4: D7.1 24.064,36.329 D10.2 R6.1@25.659,36.304 ; R6.1 26.034,36.379 R8.2 28.664,36.379 v1(29.115,36.83)
  Bottom Layer w0.4: Q4.1 v1(29.115,36.83)
NetD7_2: D7.2 R6.2 U2.4 | length 7
  Top Layer w0.4: U2.4 21.32,32.225 D7.2 23.549,34.454 R6.2
NetDS1_2: DS1.2 R10.1 | length 1.6
  Top Layer w0.2: DS1.2 8.89,28.917 R10.1
NetDS2_2: DS2.2 R11.1 | length 1.3
  Top Layer w0.2: DS2.2 1.651,13.726 R11.1
NetDS3_2: DS3.2 R12.1 | length 1
  Top Layer w0.4: DS3.2 R12.1
NetDS4_2: DS4.2 R13.1 | length 1
  Top Layer w0.4: R13.1 DS4.2
NetQ1_2: Q1.2 Q2.2 R16.2 R20.1 | length 14.5
  Top Layer w0.2: R16.2 9.779,4.221 11.46,2.54 v1(16.256,2.54)
Vcc: C1.1 C2.2 C5.1 C6.2 D3.1 D8.1 DS1.1 J1.13 J1.14 J2.9 J2.10 U1.5 U2.5 | length 120.1
  Top Layer w0.2: J1.14 J1.13 ; DS1.1 DS1.1@8.929,25.906 ; J2.9 J2.10 12.544,28.134 10.314,25.904 8.931,25.904 DS1.1@8.929,25.906 ; C5.1 17.884,22.534 17.884,19.676 17.004,18.796 10.816,18.796 9.547,17.527 3.431,17.527 2.54,18.418 2.54,21.78 3.56,22.8 7.439,22.8 8.929,24.29 DS1.1@8.929,25.906
  Top Layer w0.4: C5.1 15.58,26.629 18.217,29.266 19.376,29.266 20.881,27.761 27.118,27.761 D8.1 C6.2 28.545,29.986 29.337,30.778 29.337,32.283 29.984,32.93 34.888,32.93 35.941,31.877 35.941,30.226 35.245,29.53 34.423,29.53 33.909,29.016 33.909,19.981 33.286,19.358 29.738,19.358 25.133,14.753 U1.5 ; C2.2 D3.1 19.658,10.277 24.234,10.277 25.133,11.176 U1.5 ; U2.5 21.32,27.686 ; C1.1 30.473,12.477 U1.5
pads on no net: C1.0 C5.0 J1.12 J1.15 J1.MP1 J1.MP2 J2.8 J2.11 J2.MP1 J2.MP2 Q1.0 Q2.0 Q3.0 Q4.0 R1.0 R2.0 R5.0 R6.0 R10.0 R11.0 R12.0 R13.0 U1.0 U1.2 U2.0 U2.2 U3.0
copper on no net: | length 22.5
  Top Layer w0.1: 31.968,36.322 31.968,37.084 32.26,36.792 ; 32.26,36.576 32.26,36.792 ; 32.553,36.322 32.553,37.084 32.26,36.792 ; 33.349,35.995 33.349,35.741 33.73,35.36 33.73,35.995 ; 33.349,36.322 33.349,37.084 33.649,37.084 33.751,36.982 33.751,36.792 33.751,36.703 33.694,36.703 33.522,36.703 33.522,36.576 33.776,36.322 ; 33.921,36.122 34.058,36.122 34.302,36.122 34.302,36.062 33.938,35.699 33.938,35.573 33.938,35.369 ; 33.938,36.322 33.938,36.449 33.938,37.084 ; 33.945,36.322 33.945,37.084 34.245,37.084 34.347,36.982 34.347,36.792 34.347,36.703 34.29,36.703 33.945,36.703 ; 34.417,35.36 34.423,35.36 ; 34.538,36.322 34.538,37.084 ; 34.538,36.703 34.919,36.703 ; 34.677,35.741 34.677,36.122 ; 34.919,36.322 34.919,37.084 ; 35.113,36.322 35.494,36.322 ; 35.113,36.703 35.494,36.703 ; 35.113,37.084 35.251,37.084 35.494,37.084 ; 35.681,37.084 35.681,36.322 36.062,36.322 36.062,37.084 ; 36.235,36.322 36.616,36.322 36.616,36.703 36.235,36.703 36.235,37.084 36.373,37.084 36.616,37.084 ; 34.677,36.122 35.058,35.741 ; 34.677,36.122 34.677,35.36 35.058,35.36 35.058,35.741 ; 34.677,36.122 34.815,36.122 35.058,36.122 35.058,35.741 ; 32.76,36.322 33.141,36.322 33.141,37.084 32.898,37.084 32.76,37.084 32.76,36.322

## Polygon pours and split planes (outlines as drawn)
GND on Bottom Layer "Bottom Layer-GND" (solid, pour order 20): 0,0 44.45,0 44.45,39.878 0,39.878 0,0
NetC7_1 on Bottom Layer "Bottom Layer-NetC7_1" (solid, pour order 10): 15.748,21.273 16.7,20.32 40.259,20.32 41.148,21.209 41.148,30.044 39.315,31.877 23.622,31.877 19.05,27.305 16.256,27.305 15.748,26.797
NetC3_1 on Bottom Layer "Bottom Layer-NetC3_1" (solid, pour order 8): 15.748,10.414 17.78,8.382 39.751,8.382 41.148,9.779 41.148,19.066 40.275,19.939 21.336,19.939 20.447,19.05 20.447,15.494 20.002,15.049 16.446,15.05 15.748,14.351
no net on Bottom Layer "Bottom Layer-No Net" (solid, pour order 6): -1.524,35.179
NetQ1_2 on Bottom Layer "Bottom Layer-NetQ1_2" (solid, pour order 4): 15.113,30.353 15.113,10.414 19.558,5.969 19.558,0 10.795,0 10.795,5.588 9.779,6.604 0,6.604 0,33.528 11.938,33.528
"BAT 5S" on Bottom Layer "Bottom Layer-BAT 5S" (solid, pour order 2): 0,6.223 9.525,6.223 10.287,5.461 10.287,0 0,0
no net on Bottom Layer "Bottom Layer-No Net 1" (solid, pour order 0): 0,33.274
GND on Top Layer "Top Layer-GND" (solid, pour order 18): 0,39.878 44.45,39.878 44.45,0 0,0

## Keep-outs
Top Layer:
  the board outline again, w0.254